# Allegro board SCHIVATO.brd
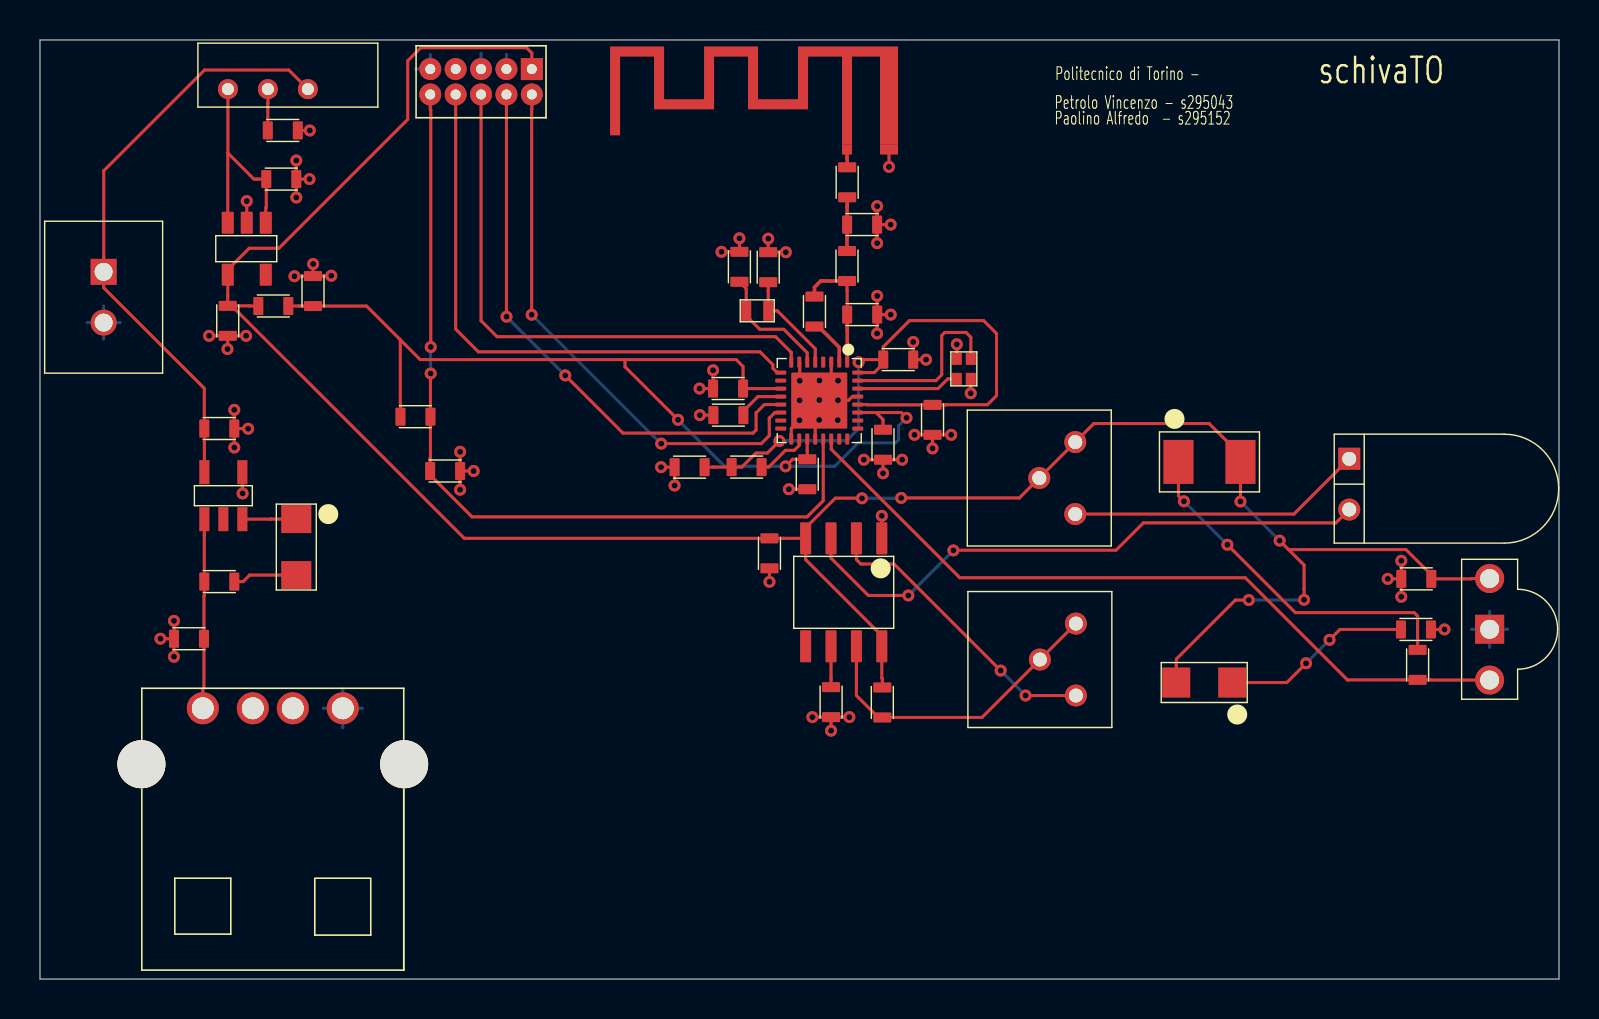
[diagram p0: board, top side]
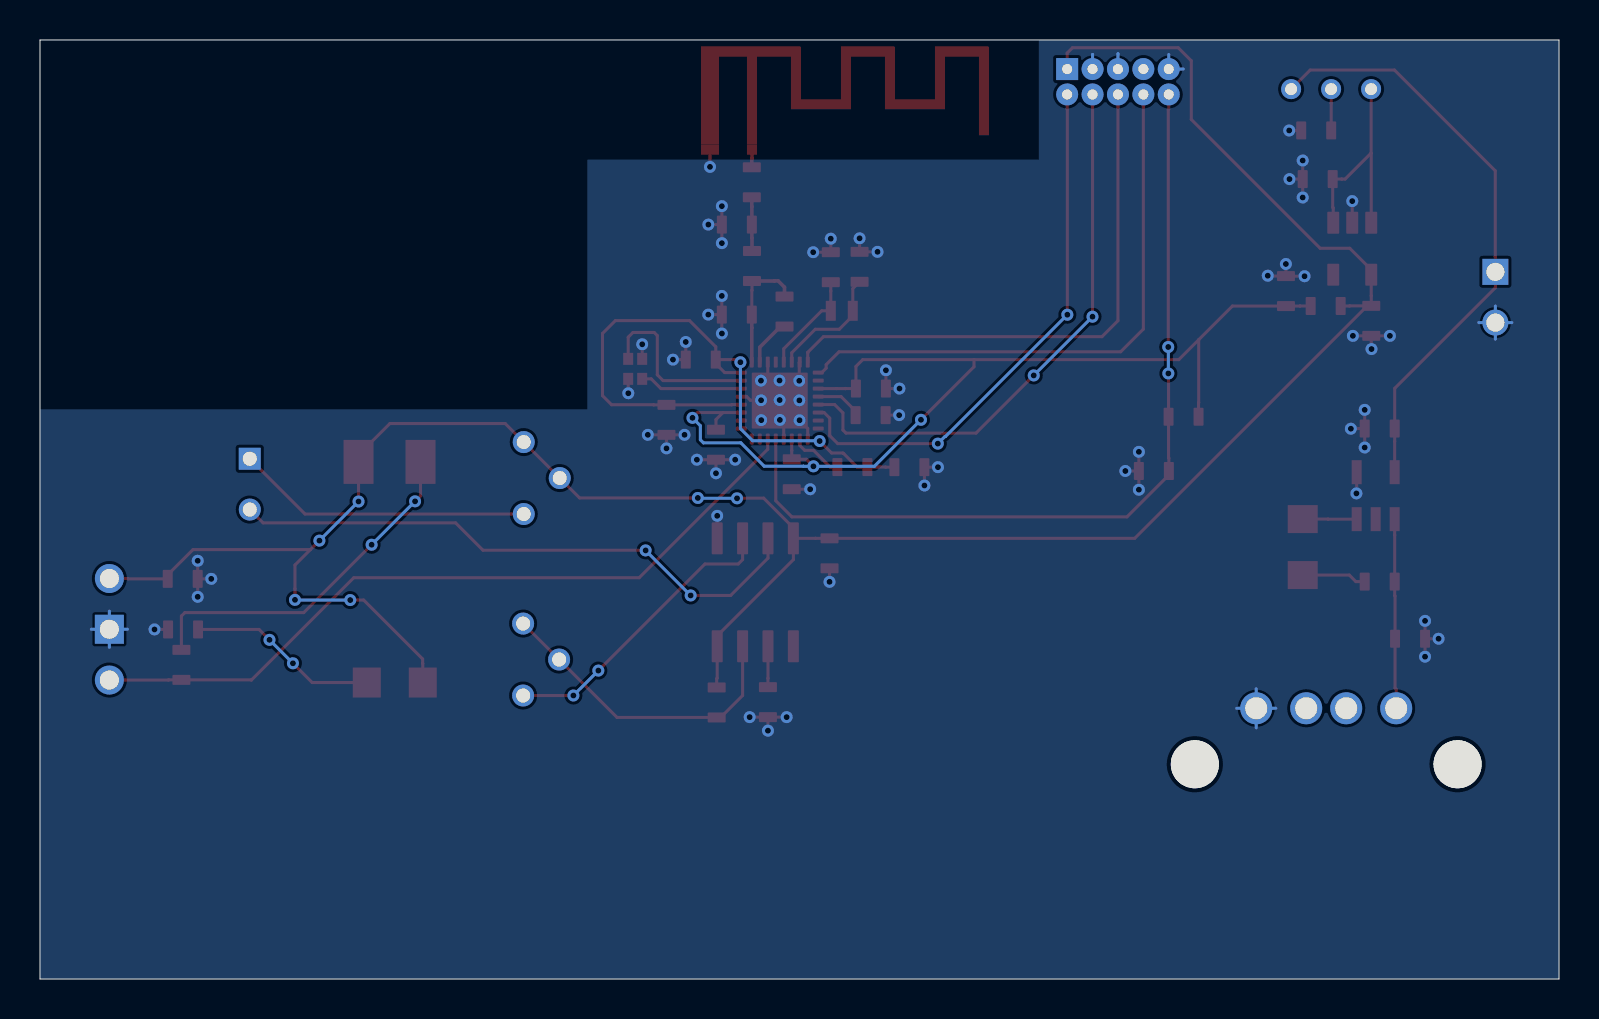
[diagram p1: board, bottom side, seen from below]

Outline 75.97 x 46.98 mm; copper layers: TOP, BOTTOM. Coordinates in mm from the lower left corner of the outline.
Outline path: 0,46.98 0,0 75.97,0 75.97,46.98 0,46.98

## Design rules (mm)
constraint set DEFAULT: min track width 0.153, pair gap 0.16

## Placement (name value [footprint] x y rotation side)
A1  ANTENNA  [PATCHANTENNA]  43.41 41.75 0 top
BATCONN  -  [JST-XH2P-ST]  3.18 34.11 270 top
C1  12pF  [0603CAPACITORS]  40.37 39.86 270 top
C2  1.2pF  [0603CAPACITORS]  41.12 37.74 180 top
C3  1.2pF  [0603CAPACITORS]  41.12 33.24 180 top
C4  1uF  [0603CAPACITORS]  34.43 28.21 0 top
C5  12pF  [0603CAPACITORS]  34.98 35.63 270 top
C6  12pF  [0603CAPACITORS]  36.42 35.61 270 top
C7  100nF  [0603CAPACITORS]  20.26 25.42 180 top
C8  100nF  [0603CAPACITORS]  34.41 29.54 0 top
C9  100nF  [0603CAPACITORS]  42.16 26.73 90 top
C10  10uF  [0603CAPACITORS]  38.37 25.25 90 top
C11  100nF  [0603CAPACITORS]  13.66 34.42 270 top
C12  10uF  [0603CAPACITORS]  32.49 25.61 0 top
C13  100nF  [0603CAPACITORS]  44.64 27.98 90 top
C14  100nF  [0603CAPACITORS]  42.92 30.99 180 top
C15  1nF  [0603CAPACITORS]  39.56 13.85 90 top
C16  100nF  [0603CAPACITORS]  68.83 20.02 0 top
C17  10uF  [0603CAPACITORS]  9.39 32.93 90 top
C18  10uF  [0603CAPACITORS]  12.07 40.02 180 top
C19  1uF  [0603CAPACITORS]  8.97 27.54 180 top
C20  1uF  [0603CAPACITORS]  7.45 17.02 0 top
D2  -  [AA3021LZGSK]  12.82 21.61 270 top
FL1  BLM18HE152SN1  [0603FERRITE]  11.67 33.67 0 top
IRLED  -  [IR333A]  65.48 24.76 90 top
JTAGCONN  FTSH-105-01-L-D  [JTAGCONN]  22.06 44.89 180 top
L1  2nH  [0603IMPEDANCE]  40.36 35.67 90 top
L2  15nH  [0603IMPEDANCE]  38.73 33.39 90 top
L3  10uH  [0603IMPEDANCE]  35.34 25.61 180 top
P1  3362H-1-502  [3362HXX]  49.98 25.06 270 top
P2  3362H-1-103  [3362HXX]  50.01 15.98 270 top
PLED  -  [AA3021LZGSK]  58.23 14.83 180 top
R1  100k  [0603RESISTORS]  18.78 28.13 180 top
R2  1.5k  [0603RESISTORS]  8.97 19.88 0 top
R3  22  [0603RESISTORS]  12.14 42.45 180 top
R4  22k  [0603RESISTORS]  42.13 13.84 90 top
R5  22k  [0603RESISTORS]  36.48 21.3 270 top
R6  2.2k  [0603RESISTORS]  68.9 15.72 90 top
R7  2.2k  [0603RESISTORS]  68.82 17.49 180 top
SLED  AA3528LSECKT/J3  [AA3528SESK]  58.49 25.87 0 top
SW1  SPDT SS3-H  [SS3-H]  12.4 45.22 0 top
U1  CC2640RSM  [CC2640]  38.97 28.94 270 top
U2  USB A1HSW6  [A1HSW6]  11.64 7.5 0 top
U3  -  [MAXIM1555]  9.17 24.18 180 top
U4  -  [TLV70212DBVR]  10.34 36.54 270 top
U5  -  [HS0038B3VM]  72.5 17.5 90 top
U6  -  [NE555DR]  40.2 19.35 270 top
Y1  -  [IQXC-90]  35.87 33.43 180 top
Y2  -  [IQXC-26]  46.2 30.53 90 top

## Library data of the parts
A1 = ANTENNA
BATCONN = B2S
C1-C3 = Capacitor
C4-C20 = C
D2 IRLED PLED SLED = LED
FL1 L3 = L
JTAGCONN = FTSH-105-01-F-DV
L1 L2 = Inductor
P1 P2 = POT
R1-R7 = R
SW1 = SW SLIDE-SPDT
U1 = CC2640F128RSMR
U2 = USB A1HSW6
U3 = Maxim Max 1555
U4 = TLV702xx
U5 = HS0038B3VM
U6 = NE555DR
Y1 = CRYSTAL
Y2 = CRYSTAL1-4/SM_0

## Footprints (pads in the part's own frame, mm; a bottom-side part is the same pattern mirrored in y, then rotated)
0603CAPACITORS
  rrect 0.5x0.9 smd: 1(-0.75,0) 2(0.75,0)
0603FERRITE
  rrect 0.5x0.9 smd: 1(-0.75,0) 2(0.75,0)
0603IMPEDANCE
  rrect 0.5x0.9 smd: 1(-0.75,0) 2(0.75,0)
0603RESISTORS
  rrect 0.5x0.9 smd: 1(-0.75,0) 2(0.75,0)
3362HXX
  round 1.1 hole 0.7: 1(-1.8,1.8) 2(0,0) 3(1.8,1.8)
A1HSW6
  round 2.4 hole 2.4 unplated: (-6.57,3.25) (6.57,3.25)
  round 1.6 hole 1.1: 1(-3.5,6.05) 2(-1,6.05) 3(1,6.05) 4(3.5,6.05)
AA3021LZGSK
  rect 1.4x1.5 smd: 1(-1.4,0) 2(1.4,0)
AA3528SESK
  rect 1.5x2.2 smd: 1(-1.55,0) 2(1.55,0)
CC2640
  rrect 0.55x0.2 smd: 1(-1.925,1.4) 2(-1.925,1) 3(-1.925,0.6) 4(-1.925,0.2) 5(-1.925,-0.2) 6(-1.925,-0.6) 7(-1.925,-1) 8(-1.925,-1.4) 17(1.925,-1.4) 18(1.925,-1) 19(1.925,-0.6) 20(1.925,-0.2) 21(1.925,0.2) 22(1.925,0.6) 23(1.925,1) 24(1.925,1.4)
  rrect 0.2x0.55 smd: 9(-1.4,-1.925) 10(-1,-1.925) 11(-0.6,-1.925) 12(-0.2,-1.925) 13(0.2,-1.925) 14(0.6,-1.925) 15(1,-1.925) 16(1.4,-1.925) 25(1.4,1.925) 26(1,1.925) 27(0.6,1.925) 28(0.2,1.925) 29(-0.2,1.925) 30(-0.6,1.925) 31(-1,1.925) 32(-1.4,1.925)
  rrect 2.8x2.8 smd: 33(0,0)
HS0038B3VM
  round 1.45 hole 0.95: 1(-2.54,0) 3(2.54,0)
  rect 1.45x1.45 hole 0.95: 2(0,0)
IQXC-26
  rect 0.6x0.5 smd: 1(-0.5,0.35) 2(0.5,0.35) 3(0.5,-0.35) 4(-0.5,-0.35)
IQXC-90
  rect 0.5x1 smd: 1(-0.55,0) 2(0.55,0)
IR333A
  round 1.1 hole 0.7: 1(-1.27,0)
  rect 1.1x1.1 hole 0.7: 2(1.27,0)
JST-XH2P-ST
  rect 1.3x1.3 hole 0.9: 1(-1.27,0)
  round 1.3 hole 0.9: 2(1.27,0)
JTAGCONN
  rect 1.1x1.1 hole 0.5: 1(-2.54,-0.635)
  round 1.1 hole 0.5: 2(-1.27,-0.635) 3(0,-0.635) 4(1.27,-0.635) 5(2.54,-0.635) 6(-2.54,0.635) 7(-1.27,0.635) 8(0,0.635) 9(1.27,0.635) 10(2.54,0.635)
MAXIM1555
  rect 0.5x1.2 smd: 1(0,1.175) 2(-0.95,-1.175) 3(-0.95,1.175) 4(0.95,1.175) 5(0.95,-1.175)
NE555DR
  rrect 1.6x0.55 smd: 1(-2.7,1.905) 2(-2.7,0.635) 3(-2.7,-0.635) 4(-2.7,-1.905) 5(2.7,-1.905) 6(2.7,-0.635) 7(2.7,0.635) 8(2.7,1.905)
PATCHANTENNA
  rect 0.9x0.5 smd: 1(-0.95,-0.25)
  rect 0.5x0.5 smd: 2(-3.05,-0.25)
SS3-H
  round 1 hole 0.6: 1(-3,-0.7) 2(-1,-0.7) 3(1,-0.7)
TLV70212DBVR
  rrect 1.1x0.6 smd: 1(-1.3,0.95) 2(-1.3,0) 3(-1.3,-0.95) 4(1.3,-0.95) 5(1.3,0.95)

## Nets
DVCC: C16.2 C17.2 FL1.1 JTAGCONN.1 P1.1 P1.2(T) PLED.2 R4.2 R5.1 SLED.2 U4.4(OUT) U5.3(VCC) U6.4 U6.8(VCC)
DVCC_IN: C18.2 SW1.1 U4.1 U4.3
GND: A1.1 BATCONN.2 C2.1 C3.1 C4.1 C5.1 C6.1 C7.1 C8.1 C9.1 C10.1 C11.1 C12.1 C13.1 C14.1 C15.1 C16.1 C17.1 C18.1 C19.1 C20.1 JTAGCONN.2 JTAGCONN.3 JTAGCONN.5 R3.1 R5.2 R7.1 U1.3 U1.7 U1.17 U1.20 U1.29 U1.33 U2.4 U3.2 U4.2 U5.2 U6.1 Y2.2 Y2.4
VBUS: C20.2 R2.1 U2.1(VBUS) U3.4
VDDR: C12.2 C13.2 C14.2 L3.2 U1.28 U1.32
VDDS: C8.2 C9.2 C10.2 C11.2 FL1.2 R1.2 U1.11 U1.19 U1.27
BAT+: BATCONN.1 C19.2 SW1.3 U3.5
CHG: D2.1(CATHODE) U3.3
DCDC_SW: L3.1 U1.18
DCOUPL: C4.2 U1.12
FEED: A1.2 C1.1
JTAG_TCKC: JTAGCONN.6 U1.14
JTAG_TMSC: JTAGCONN.7 U1.13
NRST: C7.2 JTAGCONN.10 R1.1 U1.21
OUT: IRLED.1(CATHODE) U6.3
RECEIVER_OUT: R6.1 U1.22 U5.1
RF_N: L2.1 U1.2
RF_P: C3.2(B) L1.1 L2.2(B) U1.1
TDI: JTAGCONN.8 U1.8
TDO: JTAGCONN.9 U1.9
TRIG: P2.3 U6.2
X24M_N: U1.30 Y2.1
X24M_P: U1.31 Y2.3(4)
X32K_Q1: C6.2 U1.5 Y1.1
X32K_Q2: C5.2 U1.6(X32K_Q2) Y1.2
N12933: P2.1 P2.2(T) R4.1 U6.7
N13156: C15.2 U6.6
N62456: C1.2(B) C2.2(B) L1.2(B)
N83628: R3.2 SW1.2
N098440: D2.2 R2.2
N134520: IRLED.2 P1.3
N140521: R6.2 SLED.1(CATHODE)
N142541: PLED.1(CATHODE) R7.2

Pads without a net: JTAGCONN 4; U1 4 10 15 16 23 24 25 26; U2 2 3; U3 1; U4 5; U6 5

## Via types
v1: diameter 0.6, hole 0.3, TOP to BOTTOM, 91 vias

## Routing (per net, layer and track width the routed paths; a pad name or vN(x,y) marks a point on that pad's centre or on a via; arc(x,y) is an arc through that point)
DVCC: length 121.6
  TOP w0.153: 9.59,33.68 21.22,22.05 R5.1 37.18,22.05 37.19,22.05 U6.4 ; 9.59,33.68 C17.2 9.39,34.18 9.39,34.18 U4.4 9.39,35.49 10.46,36.56 11.95,36.56 18.39,43 18.39,45.94 19.04,46.59 24.33,46.59 24.6,46.33 JTAGCONN.1 ; 9.59,33.68 10.47,33.68 10.48,33.67 FL1.1 ; v1(41.11,24.05) 41.1,24.06 39.78,24.06 38.29,22.57 U6.4 ; v1(62,21.93) 62.45,21.48 ; 62.45,21.48 68.32,21.48 69.58,20.22 C16.2 71.57,20.02 71.59,20.04 U5.3 ; 62.45,21.48 63.22,20.71 63.22,19.52 v1(63.22,18.97) ; v1(43.07,24.07) 48.98,24.07 P1.2 P1.1 52.7,27.79 58.47,27.79 60.04,26.22 SLED.2 v1(60.04,23.89) ; R4.2 42.13,15.03 42.1,15.05 U6.8 42.1,17.17 38.29,20.98 U6.4 ; v1(60.45,18.96) 59.78,18.96 56.83,16.01 56.83,15.79 56.83,15.79 PLED.2
  BOTTOM w0.153: v1(41.11,24.05) 43.05,24.05 v1(43.07,24.07) ; v1(63.22,18.97) 63.21,18.96 v1(60.45,18.96) ; v1(62,21.93) v1(60.04,23.89)
DVCC_IN: length 11.3
  TOP w0.153: U4.3 9.39,41.31 9.4,41.32 ; U4.1 11.29,38.58 11.32,38.6 C18.2 10.86,40.02 10.7,40.02 9.4,41.32 ; 9.4,41.32 SW1.1
GND: length 66.3
  TOP w0.153: v1(21.01,26.38) C7.1 ; C7.1 v1(21.01,24.48) ; C7.1 v1(21.69,25.42) ; v1(34.98,37.06) C5.1 v1(34.08,36.38) ; v1(31.06,25.61) C12.1 31.74,25.61 v1(31.74,24.69) ; v1(13.49,42.45) 13.49,42.45 R3.1 ; v1(46.55,29.31) 46.55,29.31 Y2.4 ; v1(13.66,35.77) 13.66,35.77 C11.1 14.55,35.17 v1(14.57,35.19) ; C19.1 10.4,27.54 v1(10.41,27.53) ; C19.1 v1(9.72,28.48) ; C19.1 v1(9.72,26.59) ; v1(38.97,27.97) 38.77,27.77 U1.20 ; C3.1 v1(42.55,33.24) ; C3.1 v1(41.87,34.18) ; C3.1 41.87,32.3 v1(41.87,32.3) ; C9.1 v1(43.12,25.98) ; C9.1 v1(41.2,25.98) ; C9.1 v1(42.16,25.3) ; C20.1 v1(6.02,17.02) ; C20.1 v1(6.7,16.13) ; C20.1 v1(6.7,17.92) ; v1(37.98,27.95) 37.57,27.54 U1.17 ; C17.1 v1(8.46,32.18) ; C17.1 v1(10.31,32.18) ; C17.1 9.39,31.53 v1(9.38,31.52) ; U1.3 39.57,30.28 v1(39.91,29.94) ; C15.1 v1(38.63,13.1) ; C15.1 v1(39.56,12.43) ; C15.1 v1(40.48,13.1) ; C13.1 v1(45.57,27.23) ; C13.1 v1(44.64,26.55) ; C13.1 v1(43.74,27.23) ; v1(68.08,20.92) C16.1 ; C16.1 v1(67.41,20.02) ; C16.1 v1(68.08,19.12) ; v1(44.31,30.99) C14.1 v1(43.67,31.87) ; v1(39.91,28.95) 40.44,28.95 40.63,29.14 U1.29 ; Y2.2 v1(45.85,31.75) ; v1(33.66,30.45) C8.1 v1(32.99,29.54) ; U4.2 v1(10.34,38.92) ; U3.2 10.12,24.31 v1(10.13,24.29) ; C18.1 v1(12.82,40.95) ; C18.1 13.48,40.02 v1(13.48,40.02) ; C18.1 v1(12.82,39.1) ; 13.65,35.16 v1(12.73,35.16) ; v1(37.3,36.36) C6.1 v1(36.42,37.04) ; 38.38,24.5 C10.1 v1(37.45,24.5) ; U6.1 v1(42.1,23.17) ; A1.1 v1(42.46,40.63) ; C2.1 v1(41.87,38.67) ; C2.1 v1(42.54,37.74) ; C2.1 v1(41.87,36.81) ; R5.2 v1(36.48,19.87) ; C4.1 v1(33,28.21) ; v1(38,29.93) 38,30.84 U1.7 ; R7.1 v1(70.24,17.49)
  BOTTOM w0.153: 2.35,32.84 BATCONN.2 ; BATCONN.2 4.01,32.84 ; BATCONN.2 3.18,32.01 ; BATCONN.2 3.18,33.67 ; 71.6,17.5 U5.2 ; U5.2 72.5,18.4 ; U5.2 72.5,16.59 ; U5.2 73.4,17.5 ; U2.4 16.12,13.55 ; U2.4 15.14,12.57 ; U2.4 14.16,13.55 ; U2.4 15.14,14.52 ; 23.33,46.25 23.33,46.25 JTAGCONN.2 ; JTAGCONN.3 22.06,46.29 22.05,46.3 ; 19.52,46.25 JTAGCONN.5 18.79,45.52
  vias: v1(37.99,28.95) v1(38.98,29.94) v1(38.98,28.97) v1(39.9,27.96)
VBUS: length 9.5
  TOP w0.153: U3.4 8.22,22.22 8.22,22.21 R2.1 8.22,19.18 8.2,19.16 C20.2 8.2,14.55 8.14,14.5 U2.1
VDDR: length 32.1
  TOP w0.153: v1(40.94,30.86) 41.07,30.99 C14.2 ; C12.2 33.68,25.61 33.68,25.61 L3.2 35.1,25.61 35.77,26.29 35.79,26.29 35.81,26.31 36.38,26.31 v1(36.98,26.92) ; U1.32 41.72,30.34 42.17,30.79 C14.2 ; C14.2 42.17,31.63 43.48,32.94 47.19,32.94 47.84,32.3 47.84,29.19 47.38,28.73 45.28,28.73 45.28,28.73 C13.2 41.38,28.73 41.36,28.74 U1.28
  BOTTOM w0.153: v1(40.94,30.86) 40.94,27.54 40.33,26.93 36.99,26.93 v1(36.98,26.92)
VDDS: length 54.6
  TOP w0.153: 41.81,28.34 U1.27 ; 41.81,28.34 43.07,28.34 v1(43.34,28.07) ; 41.81,28.34 42.16,27.99 C9.2 ; 35.69,29.54 36.13,29.54 36.13,29.54 U1.11 ; 35.69,29.54 35.69,29.55 ; 35.69,29.54 35.68,29.54 C8.2 35.16,30.64 34.82,30.99 29.26,30.99 ; v1(31.91,27.98) 29.26,30.63 29.26,30.99 ; 29.26,30.99 19.01,30.99 18.02,31.98 ; FL1.2 12.95,33.67 12.95,33.67 C11.2 16.33,33.67 18.02,31.98 ; 18.02,31.98 18.02,28.84 18.03,28.83 R1.2 ; v1(37.29,25.65) 37.64,26 C10.2 38.37,26.44 U1.19
  BOTTOM w0.153: v1(31.91,27.98) 34.24,25.65 v1(37.29,25.65) 37.79,25.65 37.8,25.66 39.75,25.66 40.92,26.82 42.79,26.82 42.94,26.98 42.94,27.68 v1(43.34,28.07)
BAT+: length 29.9
  TOP w0.153: SW1.3 12.44,45.48 8.23,45.48 3.19,40.44 3.19,36.14 3.18,36.13 BATCONN.1 3.18,34.58 8.22,29.55 C19.2 8.22,26.9 8.22,26.9 U3.5
CHG: length 2.7
  TOP w0.153: U3.3 11.55,23.01 11.55,23.01 D2.1
DCDC_SW: length 2.7
  TOP w0.153: L3.1 36.44,25.61 37.28,26.45 37.73,26.45 37.97,26.7 U1.18
DCOUPL: length 2.4
  TOP w0.153: U1.12 35.91,29.14 35.18,28.41 C4.2
FEED: length 0.9
  TOP w0.153: A1.2 40.37,41.49
  TOP w0.18: C1.1 40.37,41.05 40.36,41.06 A1.2
JTAG_TCKC: length 27.3
  TOP w0.153: v1(24.59,33.23) 24.59,43.5 24.6,43.51 JTAGCONN.6 ; U1.14 36.75,28.34 36.47,28.06 36.47,27.18 36.07,26.79 v1(31.07,26.79)
  BOTTOM w0.153: v1(31.07,26.79) 30.71,27.14 30.68,27.14 v1(24.59,33.23)
JTAG_TMSC: length 28.3
  TOP w0.153: v1(26.27,30.2) 29.16,27.31 35.66,27.31 35.81,27.46 35.81,28.32 36.23,28.74 U1.13 ; JTAGCONN.7 23.33,33.14 v1(23.33,33.14)
  BOTTOM w0.153: v1(23.33,33.14) v1(26.27,30.2)
NRST: length 43
  TOP w0.153: v1(19.54,31.62) 19.54,43.49 19.52,43.51 JTAGCONN.10 ; U1.21 39.17,23.93 38.36,23.12 21.61,23.12 19.51,25.22 C7.2 19.51,26.06 19.53,26.07 R1.1 19.53,30.28 v1(19.54,30.3)
  BOTTOM w0.153: v1(19.54,31.62) 19.54,31.62 v1(19.54,30.3)
OUT: length 29.5
  TOP w0.153: IRLED.1 64.81,22.82 55.18,22.82 53.81,21.45 45.69,21.45 v1(45.68,21.44) ; U6.3 39.56,21.06 41.43,19.19 v1(43.43,19.19)
  BOTTOM w0.153: v1(45.68,21.44) v1(43.43,19.19)
RECEIVER_OUT: length 38.2
  TOP w0.153: U1.22 39.57,26.51 46,20.08 60.28,20.08 65.4,14.96 65.41,14.97 R6.1 69.54,14.97 69.55,14.96 U5.1
RF_N: length 2.4
  TOP w0.18: L2.1 38.93,32.64 39.97,31.6 U1.2
RF_P: length 6.3
  TOP w0.153: L1.1 40.36,34.45 40.37,34.45 C3.2
  TOP w0.18: C3.2 40.37,32.57 40.37,32.57 U1.1 ; L1.1 39.24,34.92 39.24,34.93 39.05,34.93 38.73,34.61 L2.2
TDI: length 28
  TOP w0.153: JTAGCONN.8 22.06,32.93 22.86,32.14 36.79,32.14 37.57,31.36 37.57,31.33 37.57,31.33 U1.8
TDO: length 29
  TOP w0.153: JTAGCONN.9 20.79,32.51 21.92,31.38 36.01,31.38 36.65,30.73 36.65,30.56 36.87,30.34 U1.9
TRIG: length 14.9
  TOP w0.153: P2.3 49.29,14.18 v1(49.29,14.18) ; U6.2 40.83,20.98 41.05,20.76 42.71,20.76 v1(48.05,15.43)
  BOTTOM w0.153: v1(49.29,14.18) v1(48.05,15.43)
X24M_N: length 5.2
  TOP w0.153: Y2.1 45.4,30.03 44.91,29.54 U1.30 40.93,29.57
X24M_P: length 9
  TOP w0.153: 40.93,29.97 U1.31 44.81,29.94 45.1,30.23 45.1,32.19 45.25,32.35 46.32,32.35 46.55,32.11 Y2.3
X32K_Q1: length 5.2
  TOP w0.153: C6.2 36.42,34.42 Y1.1 36.87,33.43 38.77,31.53 U1.5
X32K_Q2: length 6.1
  TOP w0.153: U1.6 38.37,31.33 37.2,32.51 35.99,32.51 35.32,33.18 Y1.2 35.32,34.54 C5.2
N12933: length 15.8
  TOP w0.153: U6.7 40.83,14.18 41.93,13.09 R4.1 47.11,13.09 P2.2 P2.1
N13156: length 2
  TOP w0.153: U6.6 39.56,15.05 39.56,15.04 C15.2
N62456: length 2.7
  TOP w0.18: C1.2 40.37,38.64 40.37,38.64 C2.2 40.37,37.08 40.36,37.07 L1.2
N83628: length 2.1
  TOP w0.153: R3.2 11.39,43.81 11.4,43.82 SW1.2
N098440: length 3.2
  TOP w0.153: R2.2 10.16,19.88 10.49,20.21 D2.2
N134520: length 14.8
  TOP w0.153: IRLED.2 62.71,23.26 P1.3
N140521: length 17.8
  TOP w0.153: v1(57.21,23.9) 56.94,24.17 SLED.1 ; v1(59.38,21.73) 62.78,18.33 68.73,18.33 68.9,18.16 R6.2
  BOTTOM w0.153: v1(57.21,23.9) v1(59.38,21.73)
N142541: length 9.5
  TOP w0.153: v1(63.32,15.8) 62.36,14.83 PLED.1 ; v1(64.49,16.97) 65.01,17.49 R7.2
  BOTTOM w0.153: v1(63.32,15.8) v1(64.49,16.97)

## Copper pours and planes (outline as drawn; the poured copper is in the pictures)
GND on BOTTOM: 0,46.98 26.02,46.98 26.02,41 48.6,41 48.6,28.5 75.97,28.5 75.97,0 0,0
Net_1 on TOP (solid shape): 31.21,44.01 33.21,44.01 33.21,46.65 35.91,46.65 35.91,44.01 37.91,44.01 37.91,46.65 42.91,46.65 42.91,41.75 42.01,41.75 42.01,46.15 40.61,46.15 40.61,41.75 40.11,41.75 40.11,46.15 38.41,46.15 38.41,43.51 35.41,43.51 35.41,46.15 33.71,46.15 33.71,43.51 30.71,43.51 30.71,46.15 29.01,46.15 29.01,42.21 28.51,42.21 28.51,46.65 31.21,46.65

## Text on the board
Ref Des/Silkscreen Top: Petrolo Vincenzo - s295043 | Paolino Alfredo  - s295152 | Politecnico di Torino - | schivaTO
